# Altium PCB NixieClock.PcbDoc
Units mm, origin at the board's own origin, x right, y up, seen from the top; angles counter-clockwise.
Board outline 140 x 54 mm, 2 copper layers (Top Layer, Bottom Layer); 57 components, 94 nets, 297 pads, 56 vias.
Unrouted connection lines stored in the file: 2.
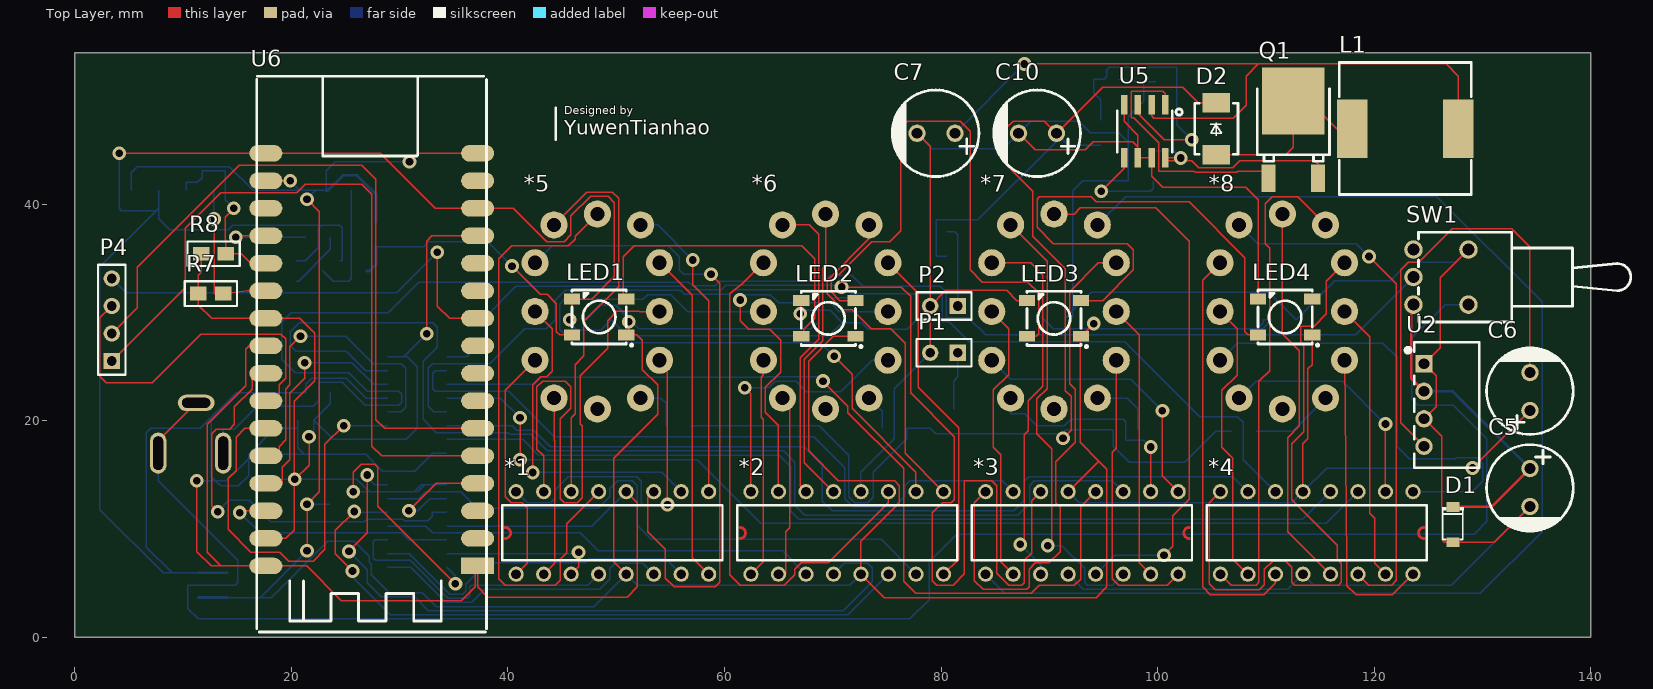
[diagram p0: Top Layer view]
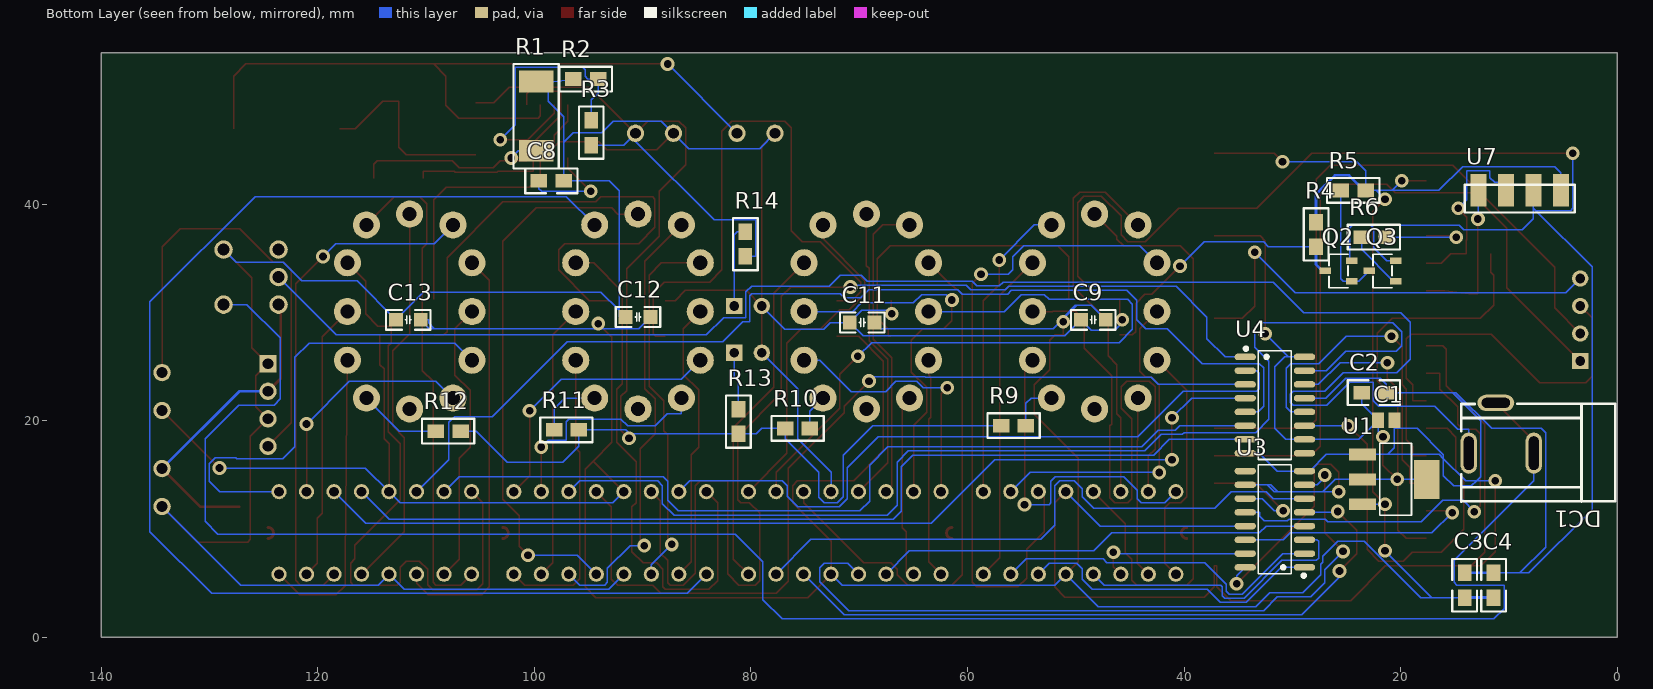
[diagram p1: Bottom Layer view, seen from below]
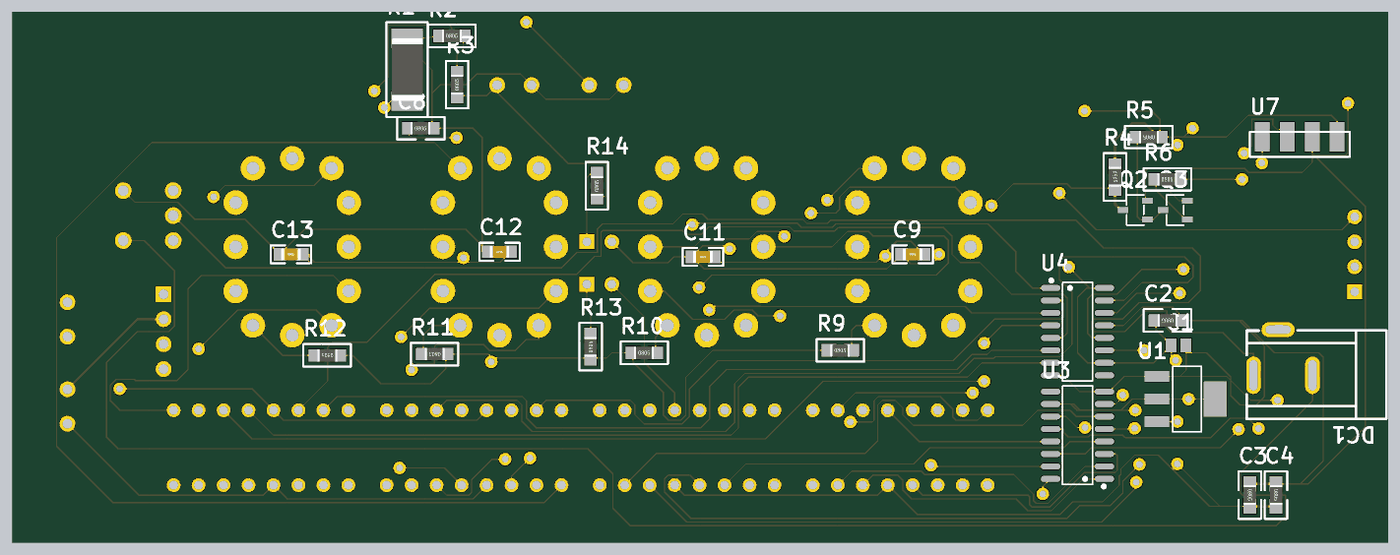
[diagram p2: 3D render of the assembled board from below, using the file's embedded part models]

## Layer stack, top to bottom
Top Solder: solder mask 0.0102, Solder Resist, Dk 3.5
Top Layer: signal copper 0.0356
Dielectric 1: dielectric 0.32, FR-4, Dk 4.8
Bottom Layer: signal copper 0.0356
Bottom Solder: solder mask 0.0102, Solder Resist, Dk 3.5

## Board outline
0,0 0,54 140,54 140,0

## Design rules (kind name [scope] priority, off if disabled: settings)
Clearance [All] p1: gap=0.254 ignorepadtopadclearanceinfootprint=FALSE except(0: Arc-Hole Track-Hole SMDPad-Hole THPad-Hole Via-Hole Fill-Hole Poly-Hole Region-Hole Text-Hole)
PolygonConnect [All] p1: connectstyle=Relief reliefconductorwidth=0.254 reliefentries=4 polygonreliefangle="90 Angle" airgapwidth=0.254
RoutingVias [All] p1: holewidth=0.711 width=1.27 viastyle="Through Hole" minholewidth=0.711 minwidth=1.27 maxholewidth=0.711 maxwidth=1.27
SolderMaskExpansion [All] p1: expansion=0.102 istentingtop=FALSE
Width [All] p1: maxlimit=0.254 minlimit=0.127 preferedwidth=0.127 minimp=50.000000 maximp=50.000000 favimp=50.000000
30 further rules are at their usual default settings.

## Components (designator, comment, footprint, x,y, rotation, side; value= is the part's Value field where it differs from the comment)
*1 "K155ID1" K155ID1 49.657,9.652 r0 top
*2 "K155ID1" K155ID1 71.332,9.652 r0 top
*3 "K155ID1" K155ID1 93.006,9.652 r180 top
*4 "K155ID1" K155ID1 114.681,9.652 r180 top
*5 "IN-12" IN12 48.26,30.099 r0 top
*6 "IN-12" IN12 69.342,30.099 r0 top
*7 "IN-12" IN12 90.424,30.099 r0 top
*8 "IN-12" IN12 111.506,30.099 r0 top
C1 "10uF" C0805 21.336,20.066 r0 bottom
C2 "0.1uF" 0805C 21.336,22.606 r0 bottom
C3 "10uF" 0805C 14.097,5.969 r270 bottom
C4 "0.1uF" 0805C 11.43,5.969 r270 bottom
C5 "2.2uF" CAP-TH_BD8.0-P3.50-D0.5-FD 134.366,13.843 r270 top
C6 "10uF" CAP-TH_BD8.0-P3.50-D0.5-FD 134.366,22.705 r90 top
C7 "100uF" CAP-TH_BD8.0-P3.50-D0.5-FD 79.536,46.555 r180 top
C8 "0.1u" 0805C 99.568,42.164 r180 bottom
C9 "Cap" "C 0805_M" 48.387,29.337 r180 bottom value=104
C10 "10uF" CAP-TH_BD8.0-P3.50-D0.5-FD 88.906,46.555 r180 top
C11 "Cap" "C 0805_M" 69.723,29.083 r180 bottom value=104
C12 "Cap" "C 0805_M" 90.424,29.591 r180 bottom value=104
C13 "Cap" "C 0805_M" 111.633,29.337 r180 bottom value=104
D1 "LMSZ5242BT1G" SOD-123_L2.7-W1.6-LS3.7-RD 127.254,10.43 r270 top
D2 "SS2200" SMB_L4.6-W3.6-LS5.3-R-RD 105.41,46.977 r270 top
DC1 "DC-005-20A_C136744" DC-IN-TH_DC-005-20A 10.715,19.343 r0 bottom
L1 "220uH" IND-SMD_L12.0-W12.0 122.862,46.99 r0 top
LED1 "WS2812B-B" LED-SMD_4P-L5.0-W5.0-BL_TC5050RGB 48.427,29.59 r180 top
LED2 "WS2812B-B" LED-SMD_4P-L5.0-W5.0-BL_TC5050RGB 69.596,29.464 r180 top
LED3 "WS2812B-B" LED-SMD_4P-L5.0-W5.0-BL_TC5050RGB 90.424,29.464 r180 top
LED4 "WS2812B-B" LED-SMD_4P-L5.0-W5.0-BL_TC5050RGB 111.76,29.591 r180 top
P1 "Header 2" HDR1X2 81.534,26.289 r180 top
P2 "Header 2" HDR1X2 81.534,30.607 r180 top
P4 "Header 4" HDR1X4#1 3.429,25.527 r90 top
Q1 "IRFR420BT" TO-252-2_L6.5-W6.1-P4.56-LS9.9-BR-CW 112.522,45.974 r270 top
Q2 "S9013 120-200" SOT-23-3_L2.9-W1.6-P1.90-LS2.8-BR 25.746,33.843 r180 bottom
Q3 "S9013 120-200" SOT-23-3_L2.9-W1.6-P1.90-LS2.8-BR 21.682,33.843 r180 bottom
R1 "10m" 2512R 99.822,48.133 r90 bottom
R2 "16k" 0805R 96.393,51.562 r180 bottom
R3 "1.8M" 0805R 94.742,45.466 r90 bottom
R4 "10k" 0805R 27.813,38.354 r270 bottom
R5 "10k" 0805R 23.241,41.275 r0 bottom
R6 "10k" 0805R 23.622,36.957 r180 bottom
R7 "4.7k" 0805R 11.43,31.75 r0 top
R8 "4.7k" 0805R 11.684,35.433 r0 top
R9 "30k" 0805R 56.896,19.558 r180 bottom
R10 "30k" 0805R 76.835,19.304 r180 bottom
R11 "30k" 0805R 95.885,19.177 r0 bottom
R12 "30k" 0805R 106.807,19.05 r0 bottom
R13 "100k" 0805R 81.153,18.796 r90 bottom
R14 "100k" 0805R 80.518,35.179 r90 bottom
SW1 "" SW-TH_ST-0-102-C03-N003-RS 126.148,33.274 r90 top
U1 "AMS1117-3.3" SOT-223-3_L6.5-W3.4-P2.30-LS7.0-BR 20.574,14.605 r0 bottom
U2 "B1205S-1W_C512041" PWRM-TH_BXXXXS-1W 124.587,21.463 r270 top
U3 "74HC595D,118" SOIC-16_L9.9-W3.9-P1.27-LS6.0-BL 31.623,10.922 r90 bottom
U4 "74HC595D,118" SOIC-16_L9.9-W3.9-P1.27-LS6.0-BL 31.623,21.463 r270 bottom
U5 "MAX1771ESA+T" SO-8_L4.9-W3.9-P1.27-LS6.0-BL 98.806,46.736 r180 top
U6 "Luatos ESP32C3" LUATOS-ESP32C3 27.305,51.816 r180 top
U7 "SHT-30" HDR1X4#2 5.207,40.525 r0 bottom

## Footprints (in the part's own frame and the unit in brackets; to place one, negate y for a bottom-side part, rotate by r counter-clockwise, add the part's x,y. Pads: shape width x height; smd on the part's side, far side on the other; paste and mask are expansions set on the pad)
0805C [mil] "2.0mmx1.2mm（蒜米工坊）"
  rect 60x50 smd: 1(0,0) 2(90,0)
  silkscreen extent -50,-45 140,45, body extent 5,-25 83,25, height 22
0805R [mil]
  rect 60x50 smd: 1(0,0) 2(90,0)
  silkscreen extent -50,-45 140,45, body extent 5,-25 83,25, height 22
2512R [mm]
  rect 2x3.2 smd: 1(-3.2,0) 2(3.2,0)
  silkscreen extent -4.83,-2.08 4.83,2.11, body extent -3.2,-1.63 3.2,1.57, height 0.7
C0805 [mm] "Chip Capacitor, Body 2.0x1.3mm, IPC High Density"
  rect 1.1x1.4 smd: 1(-0.75,0) 2(0.75,0)
  body extent -1.1,-0.72 1.1,0.72, height 1.4
"C 0805_M" [mil] "无极性贴片电容"
  rect 50x50 smd: 1(-45,0) 2(45,0)
  silkscreen extent -81,-36 81,36, body extent -39,-24 39,24, height 20
CAP-TH_BD8.0-P3.50-D0.5-FD [mm]
  round 1.6 hole 1 paste+0 mask+0.051: 1(-1.75,0) 2(1.75,0)
  silkscreen extent -3.96,-4 4.04,4
DC-IN-TH_DC-005-20A [mm]
  oval 1.5x3.8 hole 0.9 slot 3.1 at 90 deg paste+0 mask+0.051: 1(3.001,2.325) 2(-3,2.325)
  oval 3.4x1.5 hole 0.9 slot 2.6 at 0 deg paste+0 mask+0.051: 3(0.5,-2.324)
  silkscreen extent -10.51,-2.24 3.71,6.78
HDR1X2 [mm] "Connector; Header; 2 Position"
  rect 1.5x1.5 hole 0.9: 1(0,0)
  round 1.5 hole 0.9: 2(2.54,0)
  silkscreen extent -1.27,-1.27 3.81,1.27
HDR1X4#1 [mm] "Connector; Header; 4 Position"
  rect 1.5x1.5 hole 0.9: 1(0,0)
  round 1.5 hole 0.9: 2(2.54,0) 3(5.08,0) 4(7.62,0)
  silkscreen extent -1.27,-1.27 8.89,1.27
HDR1X4#2 [mm] "Connector; Header; 4 Position"
  rect 1.5x3 smd: 1(7.62,-0.75) 2(5.08,-0.75) 3(2.54,-0.75) 4(0,-0.75)
  silkscreen extent -1.27,-1.27 8.89,1.27
IN12 [mm]
  round 2.5 hole 1.3 paste+0 mask+0.051: 1(4,-8) 2(5.75,-4.5) 3(5.75,0) 4(5.75,4.5) 5(4,8) 6(0,9) 7(-4,8) 8(-5.75,4.5) 9(-5.75,0) 10(-5.75,-4.5) 11(-4,-8) 12(0,-9)
IND-SMD_L12.0-W12.0 [mm]
  rect 2.8x5.4 smd paste+0 mask+0.051: 1(4.9,0) 2(-4.9,0)
  silkscreen extent -6.1,-6.1 6.1,6.1
K155ID1 [mil]
  round 55 hole 35.83 paste+0 mask+2: 1(-350,-150) 2(-250,-150) 3(-150,-150) 4(-50,-150) 5(50,-150) 6(150,-150) 7(250,-150) 8(350,-150) 9(350,150) 10(250,150) 11(150,150) 12(50,150) 13(-50,150) 14(-150,150) 15(-250,150) 16(-350,150)
  Top Layer lines w10: -390,-20 ccw(c-390,0) -390,20
  silkscreen extent -400,-100 400,100
LED-SMD_4P-L5.0-W5.0-BL_TC5050RGB [mm]
  rect 1.5x1 smd paste+0 mask+0.051: 1(-2.5,1.65) 2(-2.5,-1.65) 3(2.5,-1.65) 4(2.5,1.65)
  silkscreen extent -3.1,-2.5 2.5,2.7
LUATOS-ESP32C3 [mil]
  rect 120x60 smd paste+0 mask+4: 1(-390,1780)
  oval 120x60 smd paste+0 mask+4: 2(-390,1680) 3(-390,1580) 4(-390,1480) 5(-390,1380) 6(-390,1280) 7(-390,1180) 8(-390,1080) 9(-390,980) 10(-390,880) 11(-390,780) 12(-390,680) 13(-390,580) 14(-390,480) 15(-390,380) 16(-390,280) 17(380,1780) 18(380,1680) 19(380,1580) 20(380,1480) 21(380,1380) 22(380,1280) 23(380,1180) 24(380,1080) 25(380,980) 26(380,880) 27(380,780) 28(380,680) 29(380,580) 30(380,480) 31(380,380) 32(380,280)
  silkscreen extent -422,0 413,2020
PWRM-TH_BXXXXS-1W [mm]
  rect 1.6x1.6 hole 1 paste+0 mask+0.051: 1(-3.81,0)
  round 1.6 hole 1 paste+0 mask+0.051: 2(-1.27,0) 3(1.27,0) 4(3.81,0)
  silkscreen extent -5.8,-1.68 5.8,5.1
SMB_L4.6-W3.6-LS5.3-R-RD [mm]
  rect 1.8x2.54 smd paste+0 mask+0.051: 1(2.4,0) 2(-2.4,0)
  silkscreen extent -2.35,-2 2.35,2
SO-8_L4.9-W3.9-P1.27-LS6.0-BL [mm]
  rect 0.6x1.8 smd paste+0 mask+0.05: 1(-1.905,-2.45) 2(-0.635,-2.45) 3(0.635,-2.45) 4(1.905,-2.45) 5(1.905,2.45) 6(0.635,2.45) 7(-0.635,2.45) 8(-1.905,2.45)
  silkscreen extent -3.46,-2.06 2.54,1.91
SOD-123_L2.7-W1.6-LS3.7-RD [mm]
  rect 0.91x1.22 smd paste+0 mask+0.051: 1(-1.635,0) 2(1.635,0)
  silkscreen extent -1.6,-1 1.38,1
SOIC-16_L9.9-W3.9-P1.27-LS6.0-BL [mm]
  oval 0.602x1.971 smd: 1(-4.445,-2.735) 2(-3.175,-2.735) 3(-1.905,-2.735) 4(-0.635,-2.735) 5(0.635,-2.735) 6(1.905,-2.735) 7(3.175,-2.735) 8(4.445,-2.735) 9(4.445,2.736) 10(3.175,2.736) 11(1.905,2.736) 12(0.635,2.736) 13(-0.635,2.736) 14(-1.905,2.736) 15(-3.175,2.736) 16(-4.445,2.736)
  silkscreen extent -5.36,-2.82 5.03,1.52
SOT-23-3_L2.9-W1.6-P1.90-LS2.8-BR [mm]
  rect 1.07x0.6 smd paste+0 mask+0.051: 1(1.235,-0.95) 2(1.235,0.95) 3(-1.235,0)
  silkscreen extent -0.88,-1.54 0.88,1.54
SOT-223-3_L6.5-W3.4-P2.30-LS7.0-BR [mm]
  rect 2.5x1.1 smd paste+0 mask+0.051: 1(2.97,-2.3) 2(2.97,0) 3(2.97,2.3)
  rect 2.34x3.6 smd paste+0 mask+0.051: 4(-2.97,0)
  silkscreen extent -1.57,-3.33 1.37,3.33
SW-TH_ST-0-102-C03-N003-RS [mm]
  round 1.7 hole 1.1 paste+0 mask+0.051: 1(-2.54,2.54) 2(0,2.54) 3(2.54,2.54) 4(2.54,-2.54) 5(-2.54,-2.54)
  silkscreen extent -4.15,-17.53 4.15,2.06
TO-252-2_L6.5-W6.1-P4.56-LS9.9-BR-CW [mm]
  rect 2.54x1.3 smd paste+0 mask+0.051: 1(3.556,-2.28) 3(3.556,2.28)
  rect 6.2x5.8 smd paste+0 mask+0.051: 2(-3.556,0)
  silkscreen extent -4.7,-3.33 2,3.34

## Part data
C1 C2 C3 C4: library part C, "Capacitor"
C5: library part 10uF, BOM_JLCPCB Part Class="Extended Part", BOM_Manufacturer=UNITED(怡德), BOM_Manufacturer Part=LW100M2500814PE4, BOM_Supplier=LCSC, BOM_Supplier Part=C2847238, Contributor=LCSC, nameAlias=Capacitance, spicePre=C, spiceSymbolName=LW100M2500814PE4
C6 C7 C10: BOM_JLCPCB Part Class="Extended Part", BOM_Manufacturer=UNITED(怡德), BOM_Manufacturer Part=LW100M2500814PE4, BOM_Supplier=LCSC, BOM_Supplier Part=C2847238, Contributor=LCSC, nameAlias=Capacitance, spicePre=C, spiceSymbolName=LW100M2500814PE4
C9 C11 C12 C13: "Capacitor", LatestRevisionDate=17-Jul-2002, LatestRevisionNote="Re-released for DXP Platform.", PackageDescription="Radial Cap, Thru-Hole; 2 Leads; 0.3 in Pin Spacing", PackageReference=RAD-0.3, Published=8-Jun-2000, Publisher="Altium Limited"
D1: BOM_JLCPCB Part Class="Extended Part", BOM_Manufacturer=LRC(乐山无线电), BOM_Manufacturer Part=LMSZ5242BT1G, BOM_Supplier=LCSC, BOM_Supplier Part=C124150, Contributor=LCSC, spicePre=D, spiceSymbolName=LMSZ5242BT1G
D2: BOM_JLCPCB Part Class="Extended Part", BOM_Manufacturer=MDD, BOM_Manufacturer Part=SS2200, BOM_Supplier=LCSC, BOM_Supplier Part=C64997, spicePre=D, spiceSymbolName=SS2200
DC1: BOM_JLCPCB Part Class="Extended Part", BOM_Manufacturer=韩国韩荣, BOM_Manufacturer Part=DC-005-20A, BOM_Supplier=LCSC, BOM_Supplier Part=C136744, Contributor=LCSC, spicePre=D, spiceSymbolName=DC-005-20A_C136744
L1: BOM_JLCPCB Part Class="Extended Part", BOM_Manufacturer="Sunltech Tech", BOM_Manufacturer Part=SLH1207S221MTT, BOM_Supplier=LCSC, BOM_Supplier Part=C182174, Contributor=LCSC, nameAlias=Inductance, spicePre=L, spiceSymbolName=SLH1207S221MTT
LED1 LED2 LED3 LED4: Emitted Color=RGB三色, JLCPCB Part Class="Extended Part", LCSC Part Name="RGB三色 （注意防潮，请查阅规格书中对应具体内容）", Manufacturer=worldsemi, Add into BOM=yes, Convert to PCB=yes, Datasheet=https://atta.szlcsc.com/upload/public/pdf/source/20200615/C114586_26EB6813EC9F2A3F6C7FBB2AD75DE01F.pdf, Device=WS2812B-B, Manufacturer Part=WS2812B-B, Name=WS2812B-B, Supplier=LCSC, Supplier Footprint=SMD5050, Supplier Part=C114586, Symbol=WS2812B-B
P1 P2: "Header, 2-Pin", LatestRevisionDate=17-Jul-2002, LatestRevisionNote="Re-released for DXP Platform.", Publisher="Altium Limited"
P4: "Header, 4-Pin", LatestRevisionDate=17-Jul-2002, LatestRevisionNote="Re-released for DXP Platform.", Publisher="Altium Limited"
Q1: BOM_JLCPCB Part Class="Extended Part", BOM_Manufacturer="VBsemi Elec", BOM_Manufacturer Part=IRFR420BT, BOM_Supplier=LCSC, BOM_Supplier Part=C878947, Contributor=LCSC, spicePre=Q, spiceSymbolName=IRFR420BT
Q2 Q3: BOM_JLCPCB Part Class="Extended Part", BOM_Manufacturer=CJ(江苏长电/长晶), BOM_Manufacturer Part=S9013, BOM_Supplier=LCSC, BOM_Supplier Part=C107404, spicePre=Q, spiceSymbolName="S9013 120-200"
R2 R4 R5 R6 R7 R8 R9 R10 R11 R12 R13 R14: library part 1.6k, Contributor=LCEDA_Lib, nameAlias=Value(Ω), spicePre=R, spiceSymbolName=R_0805_EU
SW1: library part ST-0-102-C03-N003-RS, BOM_JLCPCB Part Class="Extended Part", BOM_Manufacturer="YUEN FUNG(源丰)", BOM_Manufacturer Part=ST-0-102-C03-N003-RS, BOM_Supplier=LCSC, BOM_Supplier Part=C1788489, Contributor=LCSC, spicePre=S, spiceSymbolName=ST-0-102-C03-N003-RS
U1: BOM_JLCPCB Part Class="Basic Part", BOM_Manufacturer=AMS, BOM_Manufacturer Part=AMS1117-3.3, BOM_Supplier=LCSC, BOM_Supplier Part=C6186, sourceId=dwIGgezVh, spicePre=U, spiceSymbolName=AMS1117-3.3, timeStamp=1476261164
U2: BOM_JLCPCB Part Class="Extended Part", BOM_Manufacturer=rlt, BOM_Manufacturer Part=B1205S-1W, BOM_Supplier=LCSC, BOM_Supplier Part=C512041, Contributor=LCSC, spicePre=U, spiceSymbolName=B1205S-1W_C512041
U3 U4: BOM_JLCPCB Part Class="Basic Part", BOM_Manufacturer=Nexperia(安世), BOM_Manufacturer Part=74HC595D,118, BOM_Supplier=LCSC, BOM_Supplier Part=C5947, spicePre=X, spiceSymbolName=74HC595D,118
U5: BOM_JLCPCB Part Class="Extended Part", BOM_Manufacturer="Maxim Integrated", BOM_Manufacturer Part=MAX1771ESA+T, BOM_Supplier=LCSC, BOM_Supplier Part=C407903, Contributor=LCSC, spicePre=U, spiceSymbolName=MAX1771ESA+T
C8: Contributor=LCEDA_Lib, nameAlias=Value(F), spicePre=C, spiceSymbolName=C_0603_US
R1 R3: Contributor=LCEDA_Lib, nameAlias=Value(Ω), spicePre=R, spiceSymbolName=R_0805_EU
U6: BOM_Supplier=LUATOS, Contributor=KagurazakaTsuki, link=https://wiki.luatos.com/chips/esp32c3/board.html, spicePre=U, spiceSymbolName="Luatos ESP32C3"

## Via types
v1: diameter 1.27, hole 0.711, Top Layer to Bottom Layer, 56 vias

## Nets (pads, with @x,y where several pads share a name; then routed paths per layer and width w, separated by ;. In a path a pad name is that pad's centre, name@x,y a point inside that pad or via, vN(x,y) a via of type N, cw(c..) or ccw(c..) an arc to the next point about the centre after c; other vN are vias at no path point)
170V: C10.1 D2.2 R3.1 R9.1 R10.1 R11.1 R12.1 R13.1 R14.1 | length 141.8
  Top Layer w0.127: v1(91.262,18.39) 91.999,19.126 91.999,22.276 91.476,22.799 91.476,34.026 88.475,37.026 88.475,41.192 86.03,43.637 86.03,47.066 86.639,47.676 89.535,47.676 C10.1 94.926,50.825 102.311,50.825 103.759,49.377 D2.2
  Bottom Layer w0.127: R9.1 68.732,19.558 71.476,16.815 71.476,12.979 72.009,12.446 73.228,12.446 73.745,12.962 73.745,15.24 76.835,18.33 R10.1 78.994,19.304 79.502,18.796 R13.1 v1@90.856,18.796 ; R14.1 79.553,35.179 79.553,38.557 83.388,38.557 90.656,45.825 C10.1 91.745,45.466 R3.1 ; v1(91.262,18.39) v1@90.856,18.796 ; R12.1 105.369,19.05 102.489,16.17 97.394,16.17 95.885,17.678 R11.1 91.542,19.177 91.161,18.796 v1@90.856,18.796
+3.3: C1.2 C2.2 R7.1 R8.1 U1.2 U1.4 U3.10 U3.16 U4.10 U4.16 U6.13 U6.18 U6.26 | length 128.4
  Top Layer w0.127: R8.1 11.684,33.706 11.43,33.452 R7.1 11.43,30.683 12.649,29.464 U6.26 20.803,29.464 22.187,28.08 22.187,23.724 20.256,21.794 v1@20.256,14.541 ; U6.18 19.507,9.144 20.256,9.893 v1@20.256,14.541 ; v1(21.641,18.542) 21.641,15.926 v1(20.32,14.605) v1@20.256,14.541 ; v1(25.73,13.462) 25.73,15.24 26.467,15.977 27.711,15.977 27.991,15.697 27.991,12.116 v1(35.154,4.953) ; v1(32.512,28.042) 32.512,36.601 32.995,37.084 U6.13
  Bottom Layer w0.127: U1.4 v1(20.32,14.605) U1.2 26.06,14.605 27.191,13.475 31.371,13.475 31.993,14.097 32.309,14.097 ; v1(21.641,18.542) 22.086,18.987 C1.2 ; C2.2 23.622,21.602 C1.2 ; v1(25.73,13.462) 31.674,13.462 32.309,14.097 ; U4.16 30.378,25.908 ; v1(32.512,28.042) 30.378,25.908 ; U3.16 35.154,5.682 v1(35.154,4.953) ; U3.10 32.309,14.097 ; C1.2 23.864,18.288 U4.10 30.607,18.288 31.623,19.304 31.623,24.994 30.709,25.908 30.378,25.908
+5: *1.5 *2.5 *3.5 *4.5 C3.2 C4.2 C6.1 C9.2 C11.2 C12.2 C13.2 LED1.1 LED2.1 LED3.1 LED4.1 R4.1 R5.1 U1.3 U2.4 U6.16 U6.31 U7.4 | length 385.8
  Top Layer w0.127: U6.31 v1(19.914,42.164) ; v1(21.463,8.001) v1(21.463,12.305) 22.593,13.435 22.593,39.332 v1(21.463,40.462) ; v1(30.912,43.917) 31.699,44.704 U6.16 ; *1.5 49.784,6.985 49.784,16.561 53.848,20.625 53.848,23.317 52.426,24.74 52.426,27.432 51.918,27.94 LED1.1@51.156,27.94 ; LED1.1 LED1.1@51.156,27.94 ; v1(51.156,29.159) LED1.1@51.156,27.94 ; LED2.1 70.06,27.814 67.767,25.522 67.767,17.221 70.51,14.478 75.7,14.478 76.158,14.021 76.158,12.446 72.602,8.89 *2.5 74.761,3.683 94.31,3.683 95.301,4.674 95.301,15.545 94.56,16.286 ; *3.5 94.56,16.286 ; v1(94.092,28.981) LED3.1 92.837,27.814 92.837,18.009 94.56,16.286 ; *4.5 113.411,17.907 113.868,18.364 113.868,24.805 114.26,25.197 LED4.1 ; v1(129.057,15.646) C6.1
  Bottom Layer w0.127: U7.4 5.207,42.915 5.766,43.474 14.276,43.474 16.474,41.275 20.803,41.275 ; C3.2 17.145,3.683 ; v1(19.914,42.164) 20.803,41.275 ; v1(21.463,8.001) 17.145,3.683 ; v1(21.463,12.305) U1.3 ; v1(21.463,40.462) 22.276,41.275 ; v1(30.912,43.917) 24.054,43.917 23.241,43.104 R5.1 22.276,41.275 ; C9.2 48.565,30.658 49.936,30.658 ; v1(51.156,29.159) 51.13,29.185 v1@51.13,29.464 ; C11.2 68.021,28.524 52.07,28.524 v1@51.13,29.464 ; *2.5 71.586,4.826 51.943,4.826 *1.5 47.942,2.857 33.401,2.857 32.115,4.144 29.054,4.144 27.397,5.801 27.397,6.747 27.204,6.941 27.204,7.506 25.806,8.903 23.386,8.903 18.166,3.683 17.145,3.683 ; C12.2 90.348,28.524 94.549,28.524 ; *3.5 92.752,12.446 112.395,12.446 *4.5 115.595,15.646 v1(129.057,15.646) ; v1(94.092,28.981) 94.549,28.524 ; 20.803,41.275 22.276,41.275 ; 49.936,30.658 50.063,30.658 51.13,29.591 v1@51.13,29.464 ; 49.936,30.658 v1@51.13,29.464 ; 94.549,28.524 109.22,28.524 ; 109.22,28.524 109.677,28.524 C13.2 109.753,29.337 109.753,29.058 109.22,28.524
  Bottom Layer w0.254: C4.2 C3.2 ; R5.1 23.368,41.275 24.765,42.672 26.066,42.672 27.813,40.925 R4.1
+12: C5.1 D1.1 SW1.1 U2.2 | length 29.9
  Top Layer w0.254: SW1.1 123.406,30.532 123.406,23.914 U2.2 ; D1.1 130.838,12.065 C5.1
  Bottom Layer w0.254: U2.2 127.226,22.733 C5.1
+12V: C7.1 L1.1 U5.2 | length 69
  Top Layer w0.127: v1(87.69,52.959) 109.296,52.959 ; U5.2 99.441,48.158 99.644,47.955 106.959,47.955 108.153,49.149 108.153,51.816 109.296,52.959 ; L1.1 127.762,51.816 126.619,52.959 109.296,52.959
  Bottom Layer w0.127: C7.1 v1(87.69,52.959)
DIN: LED1.4 Q2.3 R4.2 | length 26.1
  Top Layer w0.127: v1(40.386,34.29) 43.002,31.674 43.637,31.674 44.478,30.833 44.478,28.242 44.78,27.94 LED1.4
  Bottom Layer w0.127: R4.2 32.213,36.068 32.664,36.52 38.156,36.52 v1(40.386,34.29)
  Bottom Layer w0.254: Q2.3 27.216,33.843 27.813,34.44 R4.2
First_0: *1.16 *5.2 | length 32.2
  Top Layer w0.127: *5.2 54.737,25.599 v1(54.737,12.268)
  Bottom Layer w0.127: *1.16 41.783,12.446 43.967,12.446 44.323,12.802 44.323,13.614 45.568,14.859 51.892,14.859 52.324,14.427 52.324,12.421 52.476,12.268 v1(54.737,12.268)
First_1: *1.15 *5.3 | length 49.3
  Top Layer w0.127: *1.15 43.307,16.764 42.672,17.399 42.672,23.139 43.205,23.673 45.314,23.673 45.828,23.159 45.828,21.19 44.831,20.193 44.831,12.802 45.187,12.446 46.406,12.446 46.863,12.903 46.863,19.533 46.685,19.71 46.685,24.155 49.225,26.695 49.225,29.261 50.076,30.112 52.12,30.112 52.133,30.099 *5.3
First_2: *1.8 *5.4 | length 30.6
  Top Layer w0.127: *5.4 57.023,31.586 57.023,7.366 *1.8
First_3: *1.9 *5.5 | length 28.2
  Top Layer w0.127: v1(57.074,34.848) 57.074,32.588 58.547,31.115 *1.9
  Bottom Layer w0.127: *5.5 53.823,38.099 v1(57.074,34.848)
First_4: *1.13 *5.6 | length 56.3
  Top Layer w0.127: *5.6 46.209,37.048 46.209,36.766 45.593,36.15 43.103,36.15 43.084,36.17 40.358,36.17 39.167,34.978 39.167,5.41 39.751,4.826 44.374,4.826 44.831,5.283 44.831,7.214 45.423,7.806 45.423,10.498 *1.13
First_5: *1.14 *5.7 | length 36.4
  Top Layer w0.127: *5.7 47.284,41.123 49.657,41.123 50.216,40.564 50.216,32.385 47.015,29.185 47.015,26.01 46.209,25.203 46.209,20.65 45.847,20.289 *1.14
First_6: *1.11 *5.8 | length 61.9
  Top Layer w0.127: *1.11 52.908,12.903 52.908,9.779 54.534,8.153 54.534,5.486 55.347,4.674 59.157,4.674 59.563,5.08 59.563,32.715 v1(58.75,33.528)
  Bottom Layer w0.127: *5.8 44.08,36.17 54.813,36.17 55.829,35.154 55.829,33.934 56.236,33.528 v1(58.75,33.528)
First_7: *1.10 *5.9 | length 31
  Top Layer w0.127: v1(42.291,15.24) 42.291,23.317 43.053,24.079 43.586,24.079 44.094,24.587 44.094,28.515 *5.9
  Bottom Layer w0.127: v1(42.291,15.24) 54.229,15.24 *1.10
First_8: *1.1 *5.10 | length 22.8
  Top Layer w0.127: *1.1 41.783,6.858 41.783,11.989 41.326,12.446 40.31,12.446 39.751,13.005 39.751,22.84 *5.10
First_9: *1.2 *5.11 | length 16.7
  Top Layer w0.127: *1.2 44.323,6.858 44.323,18.161 44.26,18.224 *5.11
First_A: *1.3 U3.15 | length 14.5
  Top Layer w0.127: *1.3 46.533,6.528 v1(46.533,7.874)
  Bottom Layer w0.127: U3.15 46.406,7.747 v1(46.533,7.874)
First_B: *1.6 U3.1 | length 28.4
  Bottom Layer w0.127: U3.1 31.043,6.477 34.281,3.238 36.652,3.238 37.859,4.445 48.463,4.445 49.403,5.385 49.403,6.35 49.911,6.858 52.451,6.858 *1.6
First_C: *1.7 U3.2 | length 31
  Bottom Layer w0.127: U3.2 30.874,7.747 34.62,4 35.839,4 36.106,4.267 36.106,4.931 38.096,6.921 47.142,6.921 47.485,7.264 54.585,7.264 *1.7
First_D: *1.4 U3.3 | length 26.6
  Bottom Layer w0.127: U3.3 27.737,9.017 27.585,8.865 27.585,7.315 27.788,7.112 30.964,7.112 34.457,3.619 36.246,3.619 36.487,3.861 36.487,4.674 36.639,4.826 47.371,4.826 *1.4
Fourth_0: *4.16 *8.2 | length 28
  Top Layer w0.127: *8.2 117.475,7.02 117.475,4.801 118.339,3.937 121.666,3.937 *4.16
Fourth_1: *4.15 *8.3 | length 25.8
  Top Layer w0.127: *8.3 119.583,27.772 119.583,11.455 120.04,10.999 120.04,6.833 *4.15
Fourth_2: *4.8 *8.4 | length 59.5
  Top Layer w0.127: *4.8 104.775,12.446 104.775,4.978 105.334,4.42 109.398,4.42 109.855,4.877 109.855,6.299 110.617,7.061 111.836,7.061 112.395,6.502 112.395,5.08 112.649,4.826 116.713,4.826 116.967,5.08 116.967,6.858 116.561,7.264 116.561,8.534 112.395,12.7 112.395,17.907 113.462,18.974 113.462,26.92 113.193,27.189 113.193,28.758 114.433,28.758 115.545,29.87 115.545,32.888 *8.4
Fourth_3: *4.9 *8.5 | length 46.5
  Top Layer w0.127: *4.9 106.807,4.826 109.093,4.826 109.347,5.08 109.347,23.647 110.338,24.638 110.338,35.941 109.931,36.347 109.931,40.03 110.592,40.691 112.914,40.691 *8.5
Fourth_4: *4.13 *8.6 | length 36
  Top Layer w0.127: *8.6 111.506,28.048 113.081,26.473 113.081,19.533 112.014,18.466 112.014,9.779 *4.13
Fourth_5: *4.14 *8.7 | length 48.3
  Top Layer w0.127: *4.14 119.507,4.826 121.59,4.826 122.047,5.283 122.047,32.639 v1(119.507,35.179)
  Bottom Layer w0.127: *8.7 109.258,36.347 118.339,36.347 v1(119.507,35.179)
Fourth_6: *4.11 *8.8 | length 38.8
  Top Layer w0.127: *8.8 104.164,33.007 104.164,4.674 104.873,3.964 109.804,3.964 110.871,5.031 *4.11
Fourth_7: *4.10 *8.9 | length 26.5
  Top Layer w0.127: *8.9 107.34,28.515 107.34,24.232 105.918,22.809 105.918,17.551 106.934,16.535 106.934,7.239 *4.10
Fourth_8: *4.1 *8.10 | length 42.9
  Bottom Layer w0.127: *8.10 107.335,27.178 120.777,27.178 122.098,25.857 122.098,17.602 123.215,16.485 127.457,16.485 127.584,16.612 129.451,16.612 130.01,16.053 130.01,14.427 129.045,13.462 *4.1
Fourth_9: *4.2 *8.11 | length 22.1
  Top Layer w0.127: *4.2 v1(121.031,19.71)
  Bottom Layer w0.127: *8.11 109.08,23.673 117.069,23.673 v1(121.031,19.71)
Fourth_A: *4.3 U4.4 | length 92.4
  Top Layer w0.127: v1(41.123,16.408) v1(41.123,20.295)
  Bottom Layer w0.127: U4.4 39.319,22.098 v1(41.123,20.295) ; v1(41.123,16.408) 57.48,16.408 63.348,10.541 115.57,10.541 *4.3
Fourth_B: *4.6 U4.5 | length 99.5
  Bottom Layer w0.127: U4.5 33.172,20.828 32.664,21.336 32.664,24.892 33.045,25.273 38.329,25.273 41.567,28.511 43.561,28.511 44.386,29.337 44.386,31.156 45.278,32.048 55.959,32.048 56.294,31.712 60.5,31.712 60.911,32.122 69.106,32.122 69.859,31.369 71.383,31.369 71.764,31.75 79.908,31.75 80.085,31.572 80.085,29.134 80.772,29.134 82.601,27.305 96.952,27.305 103.861,20.396 107.366,20.396 107.899,19.863 107.899,16.434 *4.6
Fourth_C: *4.7 U4.6 | length 82.1
  Bottom Layer w0.127: U4.6 40.386,19.558 40.815,19.129 42.39,19.129 43.917,17.602 67.361,17.602 69.037,15.926 69.037,12.598 69.952,11.684 86.69,11.684 87.681,12.675 87.681,14.427 88.113,14.859 106.934,14.859 *4.7
Fourth_D: *4.4 U4.7 | length 88.1
  Bottom Layer w0.127: U4.7 41.359,18.288 42.807,16.84 65.07,16.84 66.125,15.786 66.125,11.64 66.843,10.922 113.411,10.922 *4.4
GND: *1.12 *2.12 *3.12 *4.12 C1.1 C2.1 C3.1 C4.1 C5.2 C6.2 C7.2 C8.2 C9.1 C10.2 C11.1 C12.1 C13.1 D1.2 LED1.3 LED2.3 LED3.3 LED4.3 P1.2 P2.2 Q2.2 Q3.2 R1.2 R2.1 SW1.4 U1.1 U2.1 U2.3 U3.8 U3.13 U4.8 U4.13 U5.4 U5.6 U5.7 U6.1 U6.14 U6.17 U6.25 U6.32 U7.3 | length 651.3
  Top Layer w0.127: v1(4.115,44.704) U6.32 28.194,44.704 33.274,39.624 U6.14 40.518,39.624 43.611,36.531 45.187,36.531 45.828,37.172 45.828,38.919 47.65,40.742 49.251,40.742 49.835,40.157 49.835,33.348 47.727,31.24 LED1.3@45.949,31.24 ; v1(11.278,14.478) 11.278,7.925 12.598,6.604 13.513,6.604 ; U6.25 16.104,26.924 15.799,26.619 15.799,23.227 12.255,19.683 12.255,7.861 13.513,6.604 ; v1(45.72,29.337) 45.949,29.566 LED1.3@45.949,31.24 ; LED1.3 LED1.3@45.949,31.24 ; *1.12 51.943,12.446 51.943,4.674 51.003,3.734 38.151,3.734 37.211,4.674 U6.1 36.982,6.604 36.982,4.674 35.712,3.404 24.638,3.404 21.438,6.604 U6.17 13.513,6.604 ; v1(67.005,29.896) 67.056,29.947 67.056,31.114 LED2.3 ; C7.2 78.994,45.347 P2.2 ; P1.2 P2.2 ; C10.2 88.677,45.034 93.294,45.034 94.031,45.771 97.714,45.771 98.171,45.314 ; LED3.3 87.004,31.114 86.071,32.048 80.435,32.048 P2.2 ; U5.4 96.901,47.65 98.171,46.38 98.171,45.314 ; LED4.3 109.271,31.241 109.271,40.437 108.128,41.58 100.457,41.58 99.441,42.596 U5.7 U5.6 98.171,45.314 ; SW1.4 126.086,33.212 126.086,26.772 U2.1 125.705,24.155 125.705,21.311 U2.3 126.213,18.567 126.213,9.049 126.467,8.795 D1.2 131.068,8.795 C5.2
  Bottom Layer w0.127: v1(4.115,44.704) 4.115,39.624 4.318,39.421 7.544,39.421 ; U7.3 7.747,39.624 ; v1(11.278,14.478) 13.005,14.478 ; C4.1 8.992,5.969 ; Q3.2 21.306,34.793 22.479,35.966 22.479,37.795 22.758,38.075 ; C1.1 20.586,19.304 ; Q2.2 24.714,34.793 24.714,37.821 24.46,38.075 22.758,38.075 ; U4.13 26.924,22.098 25.082,23.939 21.907,23.939 21.336,23.368 C2.1 15.215,22.606 ; U3.13 47.752,10.287 *1.12 ; U4.8 33.071,17.018 31.42,15.367 U3.8 28.42,15.367 26.882,16.905 U1.1 21.209,16.905 ; v1(45.72,29.337) 45.72,29.058 46.406,28.372 48.565,28.372 C9.1 51.029,27.838 69.621,27.838 C11.1 ; v1(67.005,29.896) 67.31,30.201 69.748,30.201 C11.1 ; *2.12 72.602,15.248 75.692,18.339 75.692,22.987 P1.2 ; C7.2 79.205,45.136 85.737,45.136 C10.2 88.277,47.676 92.71,47.676 93.777,46.609 96.393,46.609 97.282,45.72 ; P2.2 76.86,28.473 73.279,28.473 72.669,29.083 C11.1 ; *3.12 93.133,4.445 112.014,4.445 *4.12 114.427,4.826 127.099,4.826 C5.2 ; R2.1 98.197,51.333 R1.2@98.704,51.333 ; R1.2 R1.2@98.704,51.333 ; SW1.4 127.519,34.646 123.19,34.646 121.463,32.918 116.357,32.918 C13.1 110.236,31.877 93.853,31.877 C12.1@92.177,30.201 ; 7.544,39.421 7.747,39.624 ; 7.544,39.421 2.337,34.214 2.337,11.811 8.179,5.969 8.992,5.969 ; 7.747,39.624 7.747,38.684 8.77,37.661 14.172,37.661 14.586,38.075 22.758,38.075 ; 8.992,5.969 6.629,8.331 6.629,18.898 7.036,19.304 11.608,19.304 14.91,22.606 15.215,22.606 ; 13.005,14.478 13.487,13.995 15.113,13.995 16.053,14.935 16.053,16.51 ; 13.005,14.478 12.624,14.859 12.624,20.015 15.215,22.606 ; 13.005,14.478 14.021,14.478 16.053,16.51 ; 16.053,16.51 16.053,16.866 18.491,19.304 20.586,19.304 ; 16.053,16.51 16.448,16.905 21.209,16.905 ; 20.586,19.304 20.586,17.528 21.209,16.905 ; C12.1@92.177,30.201 92.177,41.25 93.091,42.164 C8.2 97.282,45.72 ; C12.1@92.177,30.201 92.177,29.591 C12.1 C12.1@92.177,30.201 ; 97.282,45.72 97.282,48.082 98.704,49.505 R1.2@98.704,51.333
  Bottom Layer w0.254: C4.1 C3.1
GPIO1: P4.1 U6.5 | length 67.8
  Top Layer w0.127: P4.1 10.211,32.309 10.211,37.805 13.478,41.072 20.498,41.072 21.285,41.859 26.492,41.859 27.432,40.919 27.432,17.678 28.346,16.764 U6.5
GPIO2: P4.2 U6.6 | length 65.5
  Top Layer w0.127: P4.2 5.791,30.429 5.791,34.186 15.217,43.612 26.492,43.612 27.813,42.291 27.813,20.117 28.626,19.304 U6.6
GPIO3: P4.3 U6.23 | length 33.6
  Top Layer w0.127: P4.3 2.337,29.515 2.337,24.105 2.921,23.52 7.163,23.52 11.659,28.016 19.05,28.016 19.494,27.572 19.494,23.914 18.898,23.317 18.898,21.844 U6.23
GPIO4: P4.4 U6.10 | length 41.3
  Top Layer w0.127: v1(33.477,35.56) 33.477,30.607 34.62,29.464 U6.10
  Bottom Layer w0.127: P4.4 4.75,31.826 29.743,31.826 v1(33.477,35.56)
I2C_SCL: R7.2 U6.27 U7.1 | length 14.3
  Top Layer w0.127: v1(12.878,38.633) 12.878,31.75 R7.2 15.926,32.004 U6.27
  Bottom Layer w0.127: U7.1 12.827,38.684 v1(12.878,38.633)
I2C_SDA: R8.2 U6.28 U7.2 | length 17.5
  Top Layer w0.127: v1(14.681,39.624) 14.681,39.573 13.919,38.811 13.919,36.728 13.97,36.678 R8.2 15.367,35.433 16.256,34.544 U6.28
  Bottom Layer w0.127: U7.2 10.287,42.037 11.328,42.037 11.759,42.469 11.759,43.093 13.895,43.093 13.895,40.411 v1(14.681,39.624)
LED: R6.2 U6.29 | length 9.3
  Top Layer w0.127: v1(14.884,36.957) 15.011,37.084 U6.29
  Bottom Layer w0.127: v1(14.884,36.957) R6.2
Net*5_1: *5.1 R9.2 | length 4.6
  Bottom Layer w0.127: *5.1 54.127,22.099 54.61,21.616 R9.2
Net*6_1: *6.1 R10.2 | length 3.3
  Bottom Layer w0.127: *6.1 74.549,20.892 R10.2
Net*7_1: *7.1 R11.2 | length 6.1
  Bottom Layer w0.127: *7.1 97.206,22.099 98.171,21.134 R11.2
Net*8_1: *8.1 R12.2 | length 7.7
  Bottom Layer w0.127: R12.2 112.457,19.05 *8.1
NetC8_1: C8.1 U5.5 | length 9.6
  Top Layer w0.127: v1(94.793,41.199) 96.901,43.307 U5.5
  Bottom Layer w0.127: v1(94.793,41.199) 99.314,41.199 99.568,41.453 C8.1
NetD2_1: D2.1 L1.2 Q1.2 | length 18.2
  Top Layer w0.127: D2.1 111.836,44.577 112.522,45.263 Q1.2 113.97,49.53 116.51,46.99 L1.2
NetDC1_1: DC1.1 SW1.2 | length 151.5
  Bottom Layer w0.127: DC1.1 13.716,19.242 14.757,19.242 16.876,21.361 22.022,21.361 22.53,21.869 22.53,23.558 24.714,23.558 26.81,21.463 29.947,21.463 30.201,21.717 30.201,22.479 29.947,22.733 27.023,22.733 25.331,24.425 20.384,24.425 19.113,25.696 19.113,29.108 19.99,29.985 28.943,29.985 31.768,32.81 56.721,32.81 57.056,32.474 59.149,32.474 59.559,32.884 69.257,32.884 69.812,33.439 71.768,33.439 72.771,32.436 79.933,32.436 80.466,31.902 80.466,29.539 82.525,29.539 84.124,27.94 118.274,27.94 SW1.2
NetDC1_2: DC1.2 DC1.3 SW1.5 | length 182.3
  Top Layer w0.127: DC1.2 7.715,18.168 DC1.3
  Bottom Layer w0.127: DC1.2 7.715,14.459 15.062,7.112 15.062,5.08 14.808,4.826 10.465,4.826 10.465,2.642 11.392,1.714 77.102,1.714 78.892,3.505 78.892,7.01 81.432,9.55 129.21,9.55 130.391,10.731 130.391,18.351 127.279,21.463 124.028,21.463 123.469,22.022 123.469,27.661 126.543,30.734 SW1.5
NetLED1_2: LED1.2 LED2.4 | length 30.5
  Top Layer w0.127: LED1.2 50.673,31.24 50.673,35.154 51.689,36.17 67.132,36.17 68.326,34.976 68.326,29.464 67.335,28.473 67.335,27.814 LED2.4
NetLED2_2: LED2.2 LED3.4 | length 53.4
  Top Layer w0.127: LED2.2 70.638,31.114 69.85,31.902 69.85,32.791 73.584,36.525 75.26,36.525 76.276,37.541 76.276,47.066 76.886,47.676 81.763,47.676 82.677,46.761 82.677,33.934 83.795,32.817 88.011,32.817 89.002,31.826 89.002,28.042 88.774,27.814 LED3.4
NetLED3_2: LED3.2 LED4.4 | length 50
  Top Layer w0.127: LED3.2 94.944,31.114 97.765,33.934 97.765,35.789 97.206,36.347 90.373,36.347 88.856,37.864 88.856,40.469 89.078,40.691 93.853,40.691 94.31,40.234 102.895,40.234 108.052,35.077 108.052,28.245 108.355,27.941 LED4.4
NetP1_1: P1.1 R13.2 | length 5.4
  Bottom Layer w0.127: R13.2 81.153,23.673 81.534,24.054 P1.1
NetP2_1: P2.1 R14.2 | length 7.7
  Bottom Layer w0.127: R14.2 81.255,37.465 81.534,37.186 P2.1
NetQ1_1: Q1.1 U5.1 | length 23.7
  Top Layer w0.127: U5.1 100.711,50.19 100.482,50.419 97.553,50.419 97.553,47.969 97.777,47.969 100.076,45.669 100.076,43.053 103.367,43.053 103.441,42.978 107.304,42.978 107.379,43.053 110.242,43.053 Q1.1
NetQ1_3: Q1.3 R1.1 U5.8 | length 20.3
  Top Layer w0.127: v1(102.133,44.272) 102.12,44.286 U5.8 100.711,44.018 103.151,44.018 103.81,43.359 106.936,43.359 107.594,44.018 114.478,44.018 114.802,43.694 Q1.3
  Bottom Layer w0.127: R1.1 101.473,44.933 v1(102.133,44.272)
NetQ2_1: Q2.1 Q3.3 R5.2 | length 11.3
  Bottom Layer w0.127: Q3.3 23.867,32.893 Q2.1 25.298,32.893 25.527,33.122 R5.2
NetQ3_1: Q3.1 R6.1 | length 5.5
  Bottom Layer w0.127: Q3.1 20.682,32.893 23.622,35.833 R6.1
NetR2_2: R2.2 R3.2 U5.3 | length 26.6
  Top Layer w0.127: U5.3 98.171,48.387 100.609,45.949 v1(103.149,45.949)
  Bottom Layer w0.127: R3.2 94.742,49.632 94.107,50.267 R2.2 95.047,51.562 95.301,51.816 95.301,52.426 95.529,52.654 101.752,52.654 101.752,47.346 v1(103.149,45.949)
RCK_1: U3.12 U6.24 | length 39.7
  Top Layer w0.127: v1(13.208,11.608) 12.648,12.167 12.648,18.821 13.069,19.242 14.3,19.242 14.757,19.698 14.757,21.284 16.408,22.936 16.408,24.384 U6.24
  Bottom Layer w0.127: v1(13.208,11.608) 14.249,12.649 16.129,12.649 18.102,10.676 26.746,10.676 26.992,10.922 30.315,10.922 30.48,10.757 32.614,10.757 33.033,11.176 33.033,11.557 U3.12
RCK_2: U4.12 U6.21 | length 29.5
  Top Layer w0.127: U6.21 18.885,16.764 18.885,17.628 19.494,18.237 19.494,22.936 19.875,23.317 19.875,26.835 v1(20.853,27.813)
  Bottom Layer w0.127: v1(20.853,27.813) 25.044,27.813 27.584,25.273 30.15,25.273 30.582,24.841 30.582,21.26 30.15,20.828 U4.12
SCK_1: U3.11 U6.4 | length 11.4
  Top Layer w0.127: v1(30.861,11.709) 33.376,14.224 U6.4
  Bottom Layer w0.127: v1(30.861,11.709) 31.674,11.709 32.791,12.827 U3.11
SCK_2: U4.11 U6.22 | length 38.7
  Top Layer w0.127: U6.22 15.723,19.304 14.91,18.491 14.91,15.418 14.172,14.68 14.172,9.983 16.281,7.874 18.923,7.874 19.761,7.036 22.022,7.036 23.112,8.126 23.112,17.828 v1(24.841,19.558)
  Bottom Layer w0.127: v1(24.841,19.558) U4.11
Second_0: *2.16 *6.2 | length 24.9
  Top Layer w0.127: v1(61.874,23.063) 62.442,22.496 *2.16
  Bottom Layer w0.127: v1(61.874,23.063) 64.089,23.063 64.693,23.667 66.605,23.667 67.564,22.708 70.739,22.708 73.63,25.599 *6.2
Second_1: *2.15 *6.3 | length 36
  Top Layer w0.127: v1(61.443,31.166) 61.443,29.261 62.255,28.448 64.16,28.448 65.176,27.432 65.176,24.511 63.774,23.109 63.774,20.782 64.982,19.575 *2.15
  Bottom Layer w0.127: v1(61.443,31.166) 61.943,31.667 64.241,31.667 64.996,30.912 69.799,30.912 70.612,30.099 *6.3
Second_2: *2.8 *6.4 | length 32
  Top Layer w0.127: *6.4 77.902,31.789 77.902,23.089 81.619,19.372 81.619,7.239 *2.8
Second_3: *2.9 *6.5 | length 32.2
  Top Layer w0.127: *6.5 73.342,36.822 69.469,32.949 69.469,31.744 70.936,30.277 71.78,30.277 73.533,28.524 75.336,28.524 76.683,27.178 76.683,17.001 *2.9
Second_4: *2.13 *6.6 | length 27.6
  Top Layer w0.127: *6.6 69.342,34.343 69.088,34.089 69.088,27.381 67.386,25.679 67.386,16.137 *2.13
Second_5: *2.14 *6.7 | length 28.4
  Top Layer w0.127: *6.7 67.844,38.099 68.707,37.236 68.707,27.54 67.005,25.838 67.005,13.978 *2.14
Second_6: *2.11 *6.8 | length 49.7
  Top Layer w0.127: *6.8 61.708,32.715 60.477,31.75 60.477,5.791 61.443,4.826 65.507,4.826 66.497,5.817 66.497,6.299 67.081,6.883 69.596,6.883 75.142,12.429 *2.11
Second_7: *2.10 *6.9 | length 64.2
  Top Layer w0.127: v1(70.123,25.959) 71.774,24.308 71.774,21.172 77.682,15.265 *2.10
  Bottom Layer w0.127: *6.9 56.591,30.099 55.024,31.667 52.901,31.667 52.451,31.217 45.215,31.217 44.767,30.769 44.767,28.461 45.999,27.229 68.853,27.229 v1(70.123,25.959)
Second_8: *2.1 *6.10 | length 20.4
  Top Layer w0.127: *2.1 63.592,6.992 63.592,20.15 63.393,20.349 63.393,24.048 63.592,24.246 *6.10
Second_9: *2.2 *6.11 | length 17.4
  Top Layer w0.127: *2.2 65.659,5.842 65.659,9.779 66.015,10.135 66.015,21.426 *6.11
Second_A: *2.3 U3.4 | length 40.5
  Bottom Layer w0.127: U3.4 32.41,10.287 33.045,9.652 46.671,9.652 48.322,8.001 65.363,8.001 *2.3
Second_B: *2.6 U3.5 | length 63
  Top Layer w0.127: v1(25.654,6.147) 24.054,7.747 24.054,9.881 v1(25.806,11.633)
  Bottom Layer w0.127: v1(25.654,6.147) 25.654,5.588 29.146,2.095 71.395,2.095 *2.6 ; v1(25.806,11.633) 25.883,11.557 U3.5
Second_C: *2.7 U3.6 | length 56.9
  Bottom Layer w0.127: U3.6 31.775,12.827 32.41,13.462 35.662,13.462 37.186,11.938 48.336,11.938 49.403,13.005 49.403,13.716 50.165,14.478 51.486,14.478 51.943,14.021 51.943,10.363 53.238,9.068 74.456,9.068 *2.7
Second_D: *2.4 U3.7 | length 68
  Top Layer w0.127: v1(25.324,7.95) 27.026,9.652 v1(27.026,15.011)
  Bottom Layer w0.127: v1(25.324,7.95) 27.013,6.261 27.013,5.067 28.317,3.763 31.38,3.763 32.666,2.476 70.959,2.476 73.635,5.152 73.635,6.452 73.228,6.858 71.078,6.858 *2.4 ; v1(27.026,15.011) 27.026,14.783 27.711,14.097 U3.7
SI_1: U3.14 U6.19 | length 22.6
  Top Layer w0.127: v1(15.24,11.532) 15.392,11.684 U6.19
  Bottom Layer w0.127: v1(15.24,11.532) 17.12,9.652 30.201,9.652 30.836,9.017 U3.14
SI_2: U4.14 U6.20 | length 22
  Top Layer w0.127: U6.20 19.152,14.224 19.152,15.697 19.875,16.421 19.875,22.555 21.234,23.914 v1(21.234,25.378)
  Bottom Layer w0.127: v1(21.234,25.378) 25.6,25.378 27.61,23.368 U4.14
Third_0: *3.16 *7.2 | length 27.1
  Top Layer w0.127: *7.2 96.174,17.491 95.783,17.1 95.783,5.436 96.393,4.826 100.88,4.826 *3.16
Third_1: *3.15 *7.3 | length 25.6
  Top Layer w0.127: *7.3 98.298,27.975 98.298,6.9 *3.15
Third_2: *3.8 *7.4 | length 49.8
  Top Layer w0.127: *3.8 83.083,12.429 83.083,5.232 83.871,4.445 87.907,4.445 88.135,4.674 88.135,6.322 88.705,6.892 89.95,6.892 90.983,7.925 90.983,12.065 90.593,12.455 90.593,16.235 92.38,18.021 92.38,22.905 91.857,23.429 91.857,31.928 94.528,34.599 *7.4
Third_3: *3.9 *7.5 | length 121.9
  Bottom Layer w0.127: *3.9 85.894,4.064 129.769,4.064 135.484,9.779 135.484,31.013 125.781,40.716 97.041,40.716 *7.5
Third_4: *3.13 *7.6 | length 51
  Top Layer w0.127: *7.6 92.287,39.099 92.862,39.675 99.822,39.675 102.921,36.576 102.921,12.776 101.397,11.252 101.397,8.407 v1(100.584,7.595)
  Bottom Layer w0.127: *3.13 96.029,7.595 v1(100.584,7.595)
Third_5: *3.14 *7.7 | length 41.8
  Top Layer w0.127: *7.7 89.789,34.734 89.789,22.987 88.849,22.047 88.849,18.796 90.212,17.433 90.212,8.856 v1(89.84,8.484)
  Bottom Layer w0.127: v1(89.84,8.484) 91.161,8.484 93.26,6.384 93.26,5.08 93.514,4.826 95.8,4.826 *3.14
Third_6: *3.11 *7.8 | length 34.5
  Top Layer w0.127: *7.8 88.265,34.599 89.408,33.456 89.408,23.216 88.062,21.869 88.062,19.101 87.681,18.72 87.681,8.966 v1(87.312,8.598)
  Bottom Layer w0.127: v1(87.312,8.598) 89.196,6.714 *3.11
Third_7: *3.10 *7.9 | length 26.3
  Top Layer w0.127: *7.9 86.258,28.515 86.258,24.282 84.836,22.86 84.836,17.551 85.513,16.874 85.513,6.985 *3.10
Third_8: *3.1 *7.10 | length 25.8
  Top Layer w0.127: v1(100.432,20.93) 100.432,14.927 *3.1
  Bottom Layer w0.127: *7.10 86.422,23.851 97.511,23.851 v1(100.432,20.93)
Third_9: *3.2 *7.11 | length 21.3
  Top Layer w0.127: *3.2 v1(99.356,17.585)
  Bottom Layer w0.127: *7.11 86.424,20.676 87.705,20.676 88.849,19.531 91.388,19.531 91.999,20.142 96.799,20.142 97.028,19.914 97.028,18.212 98.73,18.212 v1(99.356,17.585)
Third_A: *3.3 U4.15 | length 107.7
  Bottom Layer w0.127: U4.15 26.899,24.638 25.095,26.441 20.396,26.441 19.888,26.949 19.888,28.245 20.726,29.083 33.045,29.083 33.477,28.651 33.477,26.797 32.182,25.502 32.182,20.142 33.401,18.923 40.005,18.923 40.18,18.748 42.111,18.748 43.637,17.221 65.456,17.221 66.506,16.171 66.506,12.217 67.42,11.303 87.098,11.303 88.163,12.369 88.163,14.021 88.621,14.478 95.8,14.478 *3.3
Third_B: *3.6 U4.1 | length 112.2
  Top Layer w0.127: v1(70.815,32.36) 76.327,32.36 77.191,31.496 77.191,22.581 81.238,18.534 81.238,12.734 80.95,12.446 80.137,12.446 79.197,11.506 79.197,5.232 79.604,4.826 81.102,4.826 82.144,5.867 82.144,14.453 82.169,14.478 84.675,14.478 85.132,14.021 85.132,5.927 86.233,4.826 87.452,4.826 87.681,5.055 87.681,7.112 88.367,7.798 88.367,12.632 *3.6
  Bottom Layer w0.127: U4.1 36.22,25.908 37.904,27.592 37.904,29.591 40.742,32.429 56.179,32.429 56.515,32.093 59.686,32.093 60.096,32.503 70.672,32.503 v1(70.815,32.36)
Third_C: *3.7 U4.2 | length 64.6
  Bottom Layer w0.127: U4.2 33.299,24.638 33.045,24.384 33.045,22.962 33.274,22.733 40.081,22.733 44.298,18.517 68.25,18.517 71.095,15.672 71.095,12.822 71.851,12.065 75.692,12.065 76.657,13.03 76.657,14.021 77.114,14.478 85.64,14.478 *3.7
Third_D: *3.4 U4.3 | length 82.8
  Top Layer w0.127: v1(69.088,23.673) 71.393,21.367 71.393,20.766 76.539,15.621 76.539,5.173 77.648,4.064 88.313,4.064 89.062,4.813 92.316,4.813 92.879,5.376 92.879,12.065 *3.4
  Bottom Layer w0.127: U4.3 42.393,23.368 43.052,24.027 63.885,24.027 63.915,24.057 68.704,24.057 v1(69.088,23.673)
pads on no net: *5.12 *6.12 *7.12 *8.12 LED4.2 SW1.3 U3.9 U4.9 U6.2 U6.3 U6.7 U6.8 U6.9 U6.11 U6.12 U6.15 U6.30
copper on no net: | length 43
  Top Layer w0.127: 124.587,17.653 122.428,19.812 122.428,33.934 123.139,34.646 124.104,34.646 127.203,37.744 132.69,37.744 134.366,36.068 134.366,24.455

## Silkscreen, mask and mechanical layers (free items; w line width, h text height)
Top Overlay:
  lines w0.254: 44.423,45.966 44.423,48.887
  text "Designed by" at 45.185,48.031 h1.27
  text "YuwenTianhao" at 45.185,45.966 h2.29
Mechanical 1:
  the board outline again, w0.254